# Altium PCB SPARK_Controller.PcbDoc (part 1 of 2)
Units mm, origin at the board's own origin, x right, y up, seen from the top; angles counter-clockwise.
Board outline 173.28 x 117.98 mm, 2 copper layers (Top Layer, Bottom Layer); 146 components, 113 nets, 445 pads, 537 vias.
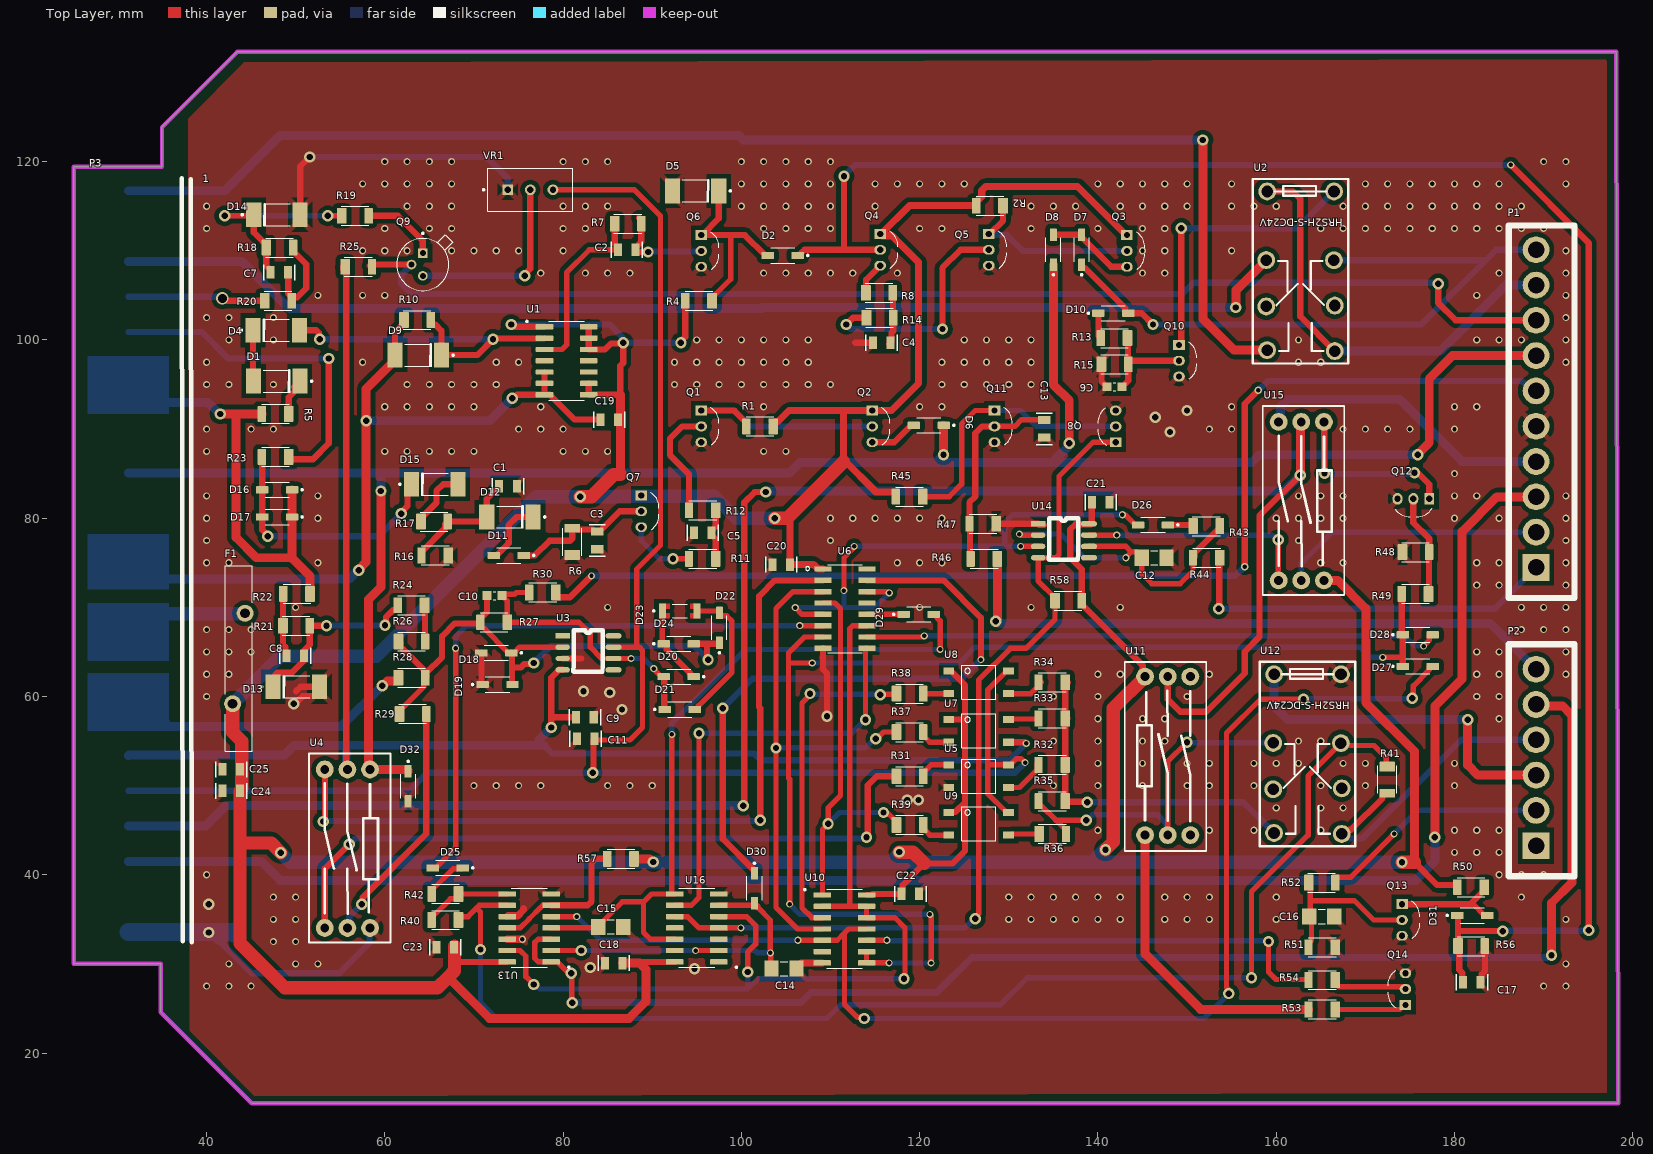
[diagram p0: Top Layer view]
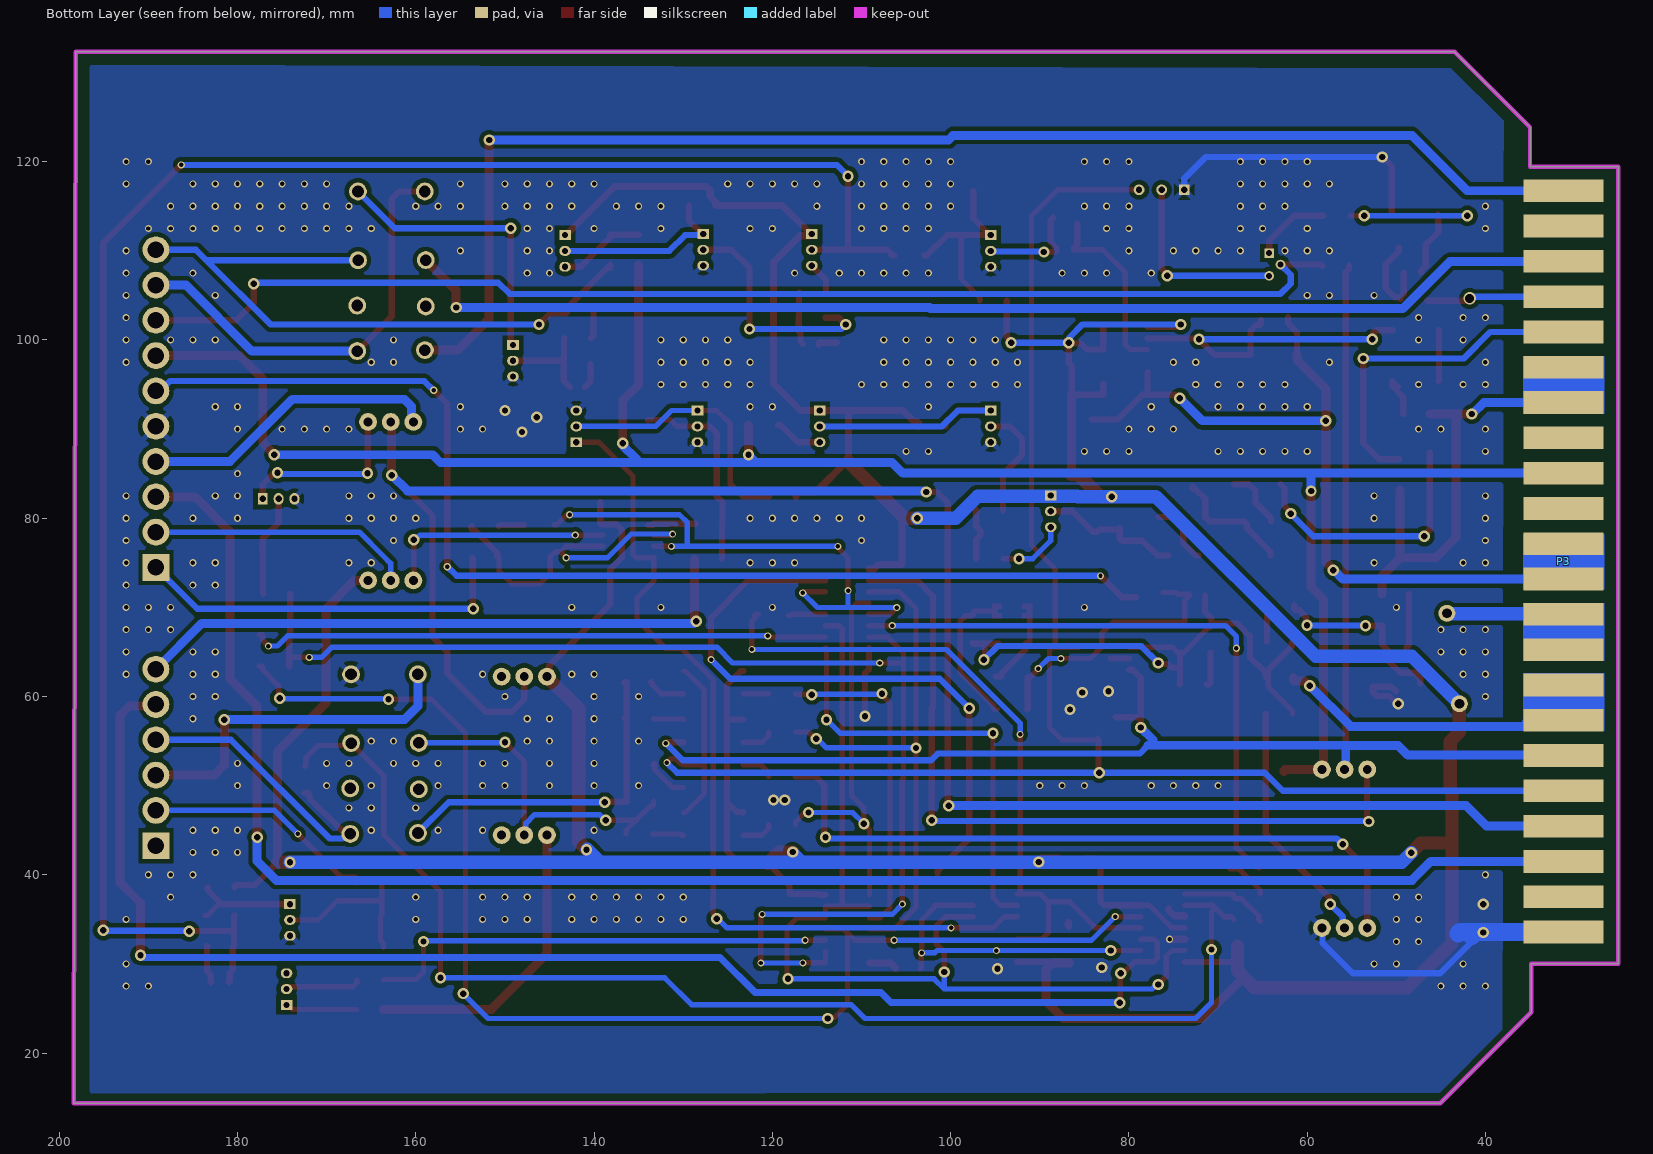
[diagram p1: Bottom Layer view, seen from below]
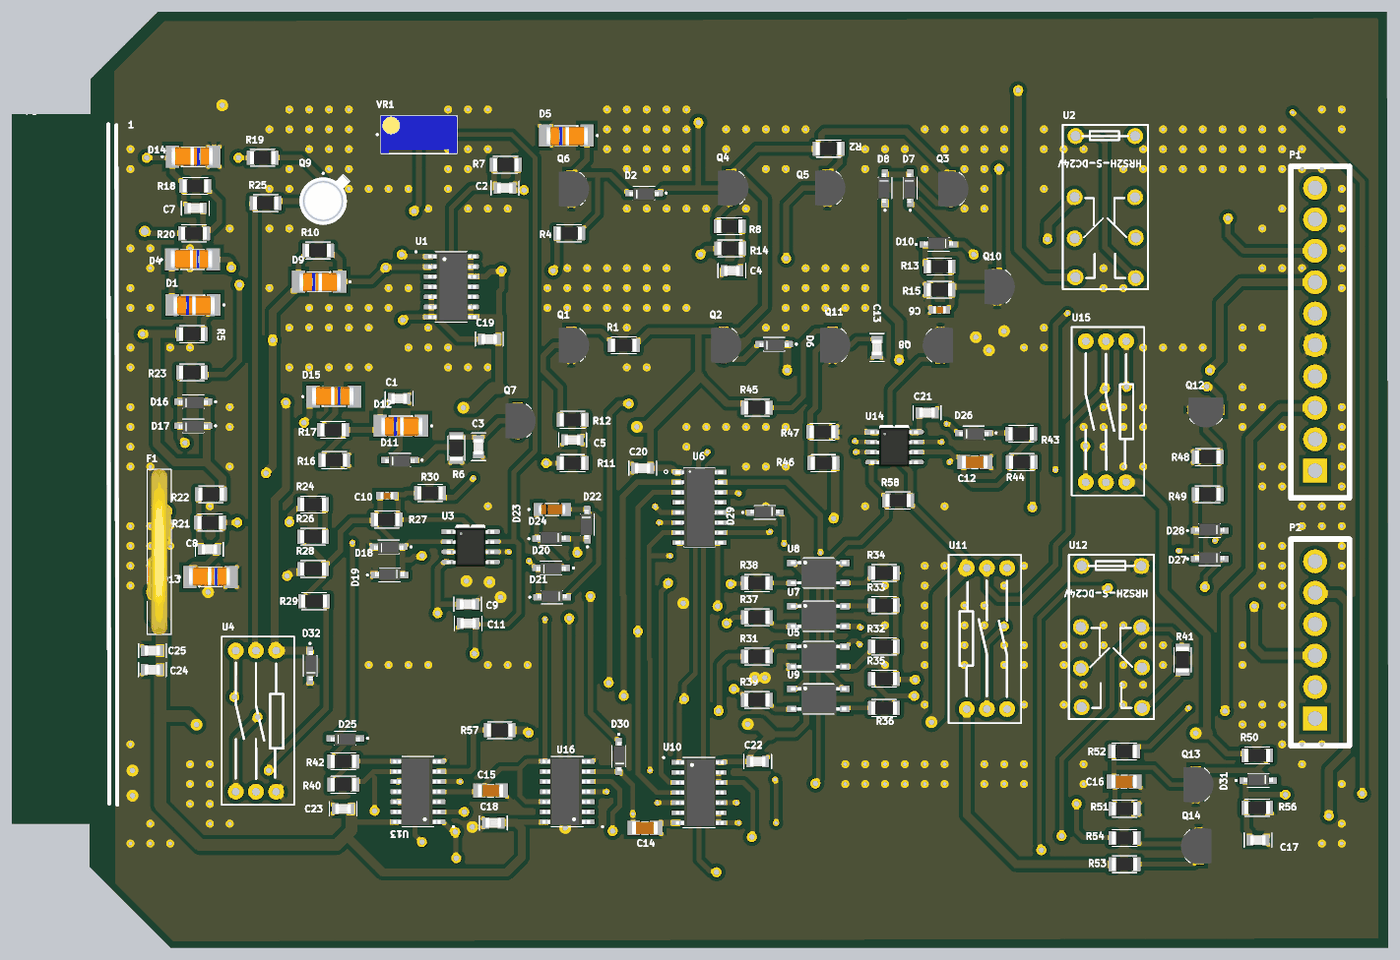
[diagram p3: 3D render of the assembled board from above, using the file's embedded part models]

## Layer stack, top to bottom
Top Solder: solder mask 0.0102, Solder Resist, Dk 3.5
Top Layer: signal copper 0.0356
Dielectric 1: dielectric 0.32, FR-4, Dk 4.8
Bottom Layer: signal copper 0.0356
Bottom Solder: solder mask 0.0102, Solder Resist, Dk 3.5

## Board outline
25.098,30.022 25.098,119.449 35.004,119.449 35.004,123.875 43.463,132.334 198.172,132.334 198.378,14.351 45.087,14.351 34.877,24.561 34.877,30.022

## Design rules (kind name [scope] priority, off if disabled: settings)
Clearance [All] p1: gap=0.5 ignorepadtopadclearanceinfootprint=FALSE except(0.4: Arc-Arc Arc-Track Arc-SMDPad Arc-THPad Arc-Via Arc-Text Arc-Hole Track-Track Track-SMDPad Track-THPad Track-Via Track-Text Track-Hole SMDPad-SMDPad SMDPad-THPad SMDPad-Via SMDPad-Text SMDPad-Hole THPad-THPad THPad-Via THPad-Text THPad-Hole Via-Via Via-Text Via-Hole Text-Text Text-Hole)
PlaneClearance [All] p1: clearance=0.6
PlaneConnect [All] p1: pad.planeconnectstyle=Relief pad.reliefexpansion=0.6 pad.reliefentries=4 pad.reliefconductorwidth=0.5 pad.reliefairgap=0.4 via.planeconnectstyle=Direct via.reliefexpansion=0.508 via.reliefentries=4 via.reliefconductorwidth=0.254 via.reliefairgap=0.254
PolygonConnect [All] p1: thpad.connectstyle=Relief thpad.reliefconductorwidth=0.6 thpad.reliefentries=4 thpad.polygonreliefangle="45 Angle" thpad.airgapwidth=0.5 smdpad.connectstyle=Relief smdpad.reliefconductorwidth=0.6 smdpad.reliefentries=4 smdpad.polygonreliefangle="45 Angle" smdpad.airgapwidth=0.5 via.connectstyle=Direct via.reliefconductorwidth=0.254 via.reliefentries=4 via.polygonreliefangle="90 Angle" via.airgapwidth=0.254
RoutingVias [All] p1: holewidth=0.711 width=1.27 viastyle="Through Hole" minholewidth=0.711 minwidth=1.27 maxholewidth=0.711 maxwidth=1.27
SolderMaskExpansion [All] p1: expansion=0.102 istentingtop=FALSE
UnRoutedNet [All] p1: checkbadconnections=TRUE
Width [All] p1: maxlimit=2 minlimit=0.6 preferedwidth=0.7
27 further rules are at their usual default settings.

## Classes and differential pairs
component class 02-Inputs_Outputs: C24 C25 F1 P1 P2 P3

## Components (designator, comment, footprint, x,y, rotation, side; value= is the part's Value field where it differs from the comment)
C1 "820pF" Cap0805 75.565,84.455 r180 top
C2 "270pF" Cap0805 85.407,109.22 r0 top
C3 "100nF" Cap0805 82.931,79.248 r270 top
C4 "10nF" Cap0805 113.98,98.804 r0 top
C5 "10nF" Cap0805 93.916,77.47 r0 top
C6 "10uF" Cap0603 141.859,94.742 r0 top
C7 "1.5nF" Cap0805 46.43,106.68 r0 top
C8 "270pF" Cap0805 51.689,65.468 r180 top
C9 "10nF" Cap0805 84.201,58.547 r180 top
C10 "560pF" Cap0603 72.302,71.316 r180 top
C11 "10nF" Cap0805 80.772,54.356 r0 top
C12 "10uF" Cap1206 146.304,75.565 r180 top
C13 "10uF" Cap0805 134.874,88.265 r90 top
C14 "10uF" Cap1206 104.775,29.464 r180 top
C15 "10uF" Cap1206 85.344,34.163 r180 top
C16 "10uF" Cap1206 165.1,35.306 r0 top
C17 "10nF" Cap0805 180.213,27.051 r0 top
C18 "100nF" Cap0805 87.439,30.988 r180 top
C19 "100nF" Cap0805 83.439,90.17 r0 top
C20 "100nF" Cap0805 102.743,73.914 r0 top
C21 "100nF" Cap0805 138.557,80.899 r0 top
C22 "100nF" Cap0805 120.713,38.735 r180 top
C23 "100nF" Cap0805 68.516,32.766 r180 top
C24 "100nF" Cap0805 41.021,48.514 r0 top
C25 "1uF" Cap0805 41.021,50.927 r0 top
D1 "24V0" Melf 47.879,95.377 r180 top
D2 "1N4148" SOD-123 104.648,109.474 r180 top
D4 "24V0" Melf 47.812,101.092 r0 top
D5 "8V2" Melf 94.869,116.713 r180 top
D6 "1N4148" SOD-123 121.031,90.424 r180 top
D7 "1N4148" SOD-123 138.176,110.109 r90 top
D8 "1N4148" SOD-123 135.001,110.109 r90 top
D9 "12V0" Melf 63.754,98.298 r180 top
D10 "1N4148" SOD-123 141.732,102.997 r0 top
D11 "1N4148" SOD-123 73.914,75.819 r180 top
D12 "3V3" Melf 74.041,80.137 r180 top
D13 "18V0" Melf 50.071,61.087 r0 top
D14 "12V0" Melf 47.902,114.046 r0 top
D15 "6V2" Melf 65.599,83.82 r0 top
D16 "1N4148" SOD-123 47.917,83.185 r180 top
D17 "1N4148" SOD-123 47.917,80.137 r180 top
D18 "1N4148" SOD-123 72.517,64.897 r180 top
D19 "1N4148" SOD-123 72.644,61.341 r0 top
D20 "1N4148" SOD-123 92.964,62.23 r180 top
D21 "1N4148" SOD-123 93.091,58.547 r0 top
D22 "1N4148" SOD-123 97.536,67.691 r90 top
D23 "3V3" MINIMELF 93.091,69.596 r0 top
D24 "1N4148" SOD-123 92.964,65.913 r0 top
D25 "1N4148" SOD-123 67.056,40.767 r180 top
D26 "1N4148" SOD-123 146.177,79.248 r180 top
D27 "1N4148" SOD-123 175.884,63.373 r0 top
D28 "1N4148" SOD-123 175.884,66.929 r0 top
D29 "1N4148" SOD-123 119.888,69.215 r0 top
D30 "1N4148" SOD-123 101.473,38.481 r270 top
D31 "1N4148" SOD-123 181.991,35.433 r0 top
D32 "1N4148" SOD-123 62.611,49.911 r270 top
F1 "PPTC-FUSE-30V1.1A" RXEF250 43.626,64.257 r270 top
P1 "PWR_HDR_10P" PWR_HDR_10P 189.146,74.48 r90 top
P2 "PWR_HDR_6P" PWR_HDR_6P 189.146,43.261 r90 top
P3 "PCI" PCI 31.242,116.735 r0 top
Q1 "BC337-DIP" SOT54 95.504,90.297 r0 top
Q2 "BC337-DIP" SOT54 114.681,90.297 r0 top
Q3 "BC337-DIP" SOT54 143.256,109.982 r0 top
Q4 "BC337-DIP" SOT54 115.57,110.109 r0 top
Q5 "BC337-DIP" SOT54 127.762,110.109 r0 top
Q6 "BC337-DIP" SOT54 95.504,109.982 r0 top
Q7 "BC337-DIP" SOT54 88.773,80.772 r0 top
Q8 "BC337-DIP" SOT54 141.986,90.297 r180 top
Q9 "BC177" TO-18 64.262,108.458 r270 top
Q10 "BC337-DIP" SOT54 149.098,97.663 r0 top
Q11 "BC337-DIP" SOT54 128.397,90.297 r0 top
Q12 "BC337-DIP" SOT54 175.387,82.169 r270 top
Q13 "BC337-DIP" SOT54 174.117,34.925 r0 top
Q14 "BC337-DIP" SOT54 174.498,27.178 r180 top
R1 "4.7K" Res1206 102.108,90.297 r180 top value=1K
R2 "1.2K" Res1206 127.889,115.062 r180 top value=1K
R4 "4.7K" Res1206 95.25,104.394 r180 top value=1K
R5 "6K8" Res1206 47.752,91.694 r180 top value=1K
R6 "330K" Res1206 81.026,77.343 r90 top value=1K
R7 "100K" Res1206 87.249,113.03 r0 top value=1K
R8 "3.9K" Res1206 115.443,105.283 r0 top value=1K
R10 "10K" Res1206 63.627,102.235 r0 top value=1K
R11 "3.9K" Res1206 95.663,75.438 r180 top value=1K
R12 "10K" Res1206 95.663,80.899 r180 top value=1K
R13 "165k" Res1206 141.859,100.203 r180 top value=1K
R14 "10K" Res1206 115.502,102.489 r0 top value=1K
R15 "8.2k" Res1206 141.859,97.282 r0 top value=1K
R16 "6K8" Res1206 65.659,75.819 r180 top value=1K
R17 "10K" Res1206 65.516,79.629 r0 top value=1K
R18 "1.2K" Res1206 48.177,110.363 r0 top value=1K
R19 "10K" Res1206 56.642,113.919 r0 top value=1K
R20 "1k" Res1206 48.006,104.394 r0 top value=1K
R21 "27K" Res1206 50.038,67.945 r0 top value=1K
R22 "1k" Res1206 50.149,71.501 r180 top value=1K
R23 "10K" Res1206 47.752,86.868 r180 top value=1K
R24 "8.2k" Res1206 62.992,70.231 r180 top value=1K
R25 "1K8" Res1206 57.023,108.204 r0 top value=1K
R26 "1K8" Res1206 62.992,66.167 r0 top value=1K
R27 "33K" Res1206 72.263,68.326 r180 top value=1K
R28 "2K2" Res1206 62.992,62.103 r0 top value=1K
R29 "47k" Res1206 63.119,58.039 r0 top value=1K
R30 "2k7" Res1206 77.724,71.672 r180 top value=1K
R31 "1K5" Res1206 118.872,51.054 r0 top value=1K
R32 "47k" Res1206 134.874,52.324 r180 top value=1K
R33 "56k" Res1206 134.874,57.531 r180 top value=1K
R34 "18k" Res1206 134.874,61.595 r180 top value=1K
R35 "18k" Res1206 134.874,48.26 r180 top value=1K
R36 "100K" Res1206 134.874,44.577 r0 top value=1K
R37 "1K5" Res1206 118.872,56.007 r0 top value=1K
R38 "1K5" Res1206 118.872,60.325 r0 top value=1K
R39 "1K5" Res1206 118.872,45.593 r0 top value=1K
R40 "1K5" Res1206 66.802,34.925 r180 top value=1K
R41 "15k" Res1206 172.466,50.673 r270 top value=1K
R42 "1k" Res1206 66.802,37.846 r180 top value=1K
R43 "10K" Res1206 152.146,79.121 r0 top value=1K
R44 "100K" Res1206 152.205,75.565 r180 top value=1K
R45 "10K" Res1206 118.872,82.423 r180 top value=1K
R46 "22K" Res1206 127.254,75.438 r180 top value=1K
R47 "10K" Res1206 127.127,79.375 r180 top value=1K
R48 "10K" Res1206 175.625,76.2 r0 top value=1K
R49 "10K" Res1206 175.625,71.501 r180 top value=1K
R50 "4.7K" Res1206 181.864,38.608 r180 top value=1K
R51 "10K" Res1206 165.164,31.877 r180 top value=1K
R52 "10K" Res1206 165.1,39.116 r0 top value=1K
R53 "390R" Res1206 165.164,24.892 r180 top value=1K
R54 "10K" Res1206 165.164,28.194 r180 top value=1K
R56 "180K" Res1206 181.865,32.004 r0 top value=1K
R57 "10K" Res1206 86.487,41.783 r180 top value=1K
R58 "1k" Res1206 136.652,70.739 r0 top value=1K
U1 "HEF4093BT" SOIC-14 80.391,97.663 r0 top
U2 "HRS2H-S-DC24V" HRS2H-S-DC24V 162.726,107.702 r270 top
U3 "OP07CD" SOP8 82.804,64.897 r0 top
U4 "OL-C-212H" ol-c-212H 58.343,51.816 r270 top
U5 "TLP127" TLP127 126.619,51.054 r0 top
U6 "CD4049UBM" SOIC-16 111.623,69.85 r0 top
U7 "TLP127" TLP127 126.619,56.134 r0 top
U8 "TLP127" TLP127 126.619,61.595 r0 top
U9 "TLP127" TLP127 126.619,45.72 r0 top
U10 "CD4011BM" SOIC-14 111.568,33.92 r0 top
U11 "OL-C-212H" ol-c-212H 145.288,44.45 r90 top
U12 "HRS2H-S-DC24V" HRS2H-S-DC24V 163.506,53.532 r270 top
U13 "HEF4066BT" SOIC-14 76.2,34.036 r180 top
U14 "NE555D" SOP8 136.144,77.47 r0 top
U15 "OL-C-212H" ol-c-212H 165.354,90.805 r270 top
U16 "NE556D" SOIC-14 94.996,34.036 r180 top
VR1 "10K" Multi_Turn 76.327,116.84 r0 top

## Footprints (in the part's own frame and the unit in brackets; to place one, negate y for a bottom-side part, rotate by r counter-clockwise, add the part's x,y. Pads: shape width x height; smd on the part's side, far side on the other; paste and mask are expansions set on the pad)
Cap0603 [mm]
  rect 1x1 smd: 1(-0.85,0) 2(0.85,0)
  silkscreen extent -0.15,-0.45 0.15,0.45, body extent -0.8,-0.45 0.8,0.45, height 0.8
Cap0805 [mm]
  rect 0.9x1.4 smd: 1(0.762,0.889) 2(2.73,0.889)
  silkscreen extent 0,0 3.49,1.78, body extent 0.74,0.26 2.74,1.51, height 0.81
Cap1206 [mm]
  rect 1.6x1.8 smd: 1(-1.4,0) 2(1.4,0)
  silkscreen extent -0.4,-0.8 0.4,0.8, body extent -1.6,-0.8 1.6,0.8, height 0.94
HRS2H-S-DC24V [mm]
  round 2 hole 1.3 paste+0 mask+0.051: 1(-8.952,-3.74) 2(-1.256,-3.849) 3(3.943,-3.849) 4(8.846,-3.75) 5(8.952,3.847) 6(3.844,3.849) 7(-1.236,3.75) 8(-8.952,3.76)
  silkscreen extent -10.36,-5.35 10.34,5.35
Melf [mm]
  rect 1.7x2.78 smd: A(2.6,0) C(-2.6,0)
  silkscreen extent -4,-1.23 1.5,1.23, body extent -2.7,-1.27 2.45,1.4, height 1.34
MINIMELF [mm]
  rect 0.8x1.65 smd: A(1.95,0) C(-1.95,0)
  Top Layer region: -1.15,0.25 -1.65,0.25 -1.65,-0.25 -1.15,-0.25 -1.15,-0.825 -2.24,-0.825 -2.24,0.825 -1.15,0.825
  Top Layer region: 2.25,-0.825 1.15,-0.825 1.15,-0.25 1.65,-0.25 1.65,0.25 1.15,0.25 1.15,0.825 2.25,0.825
  silkscreen extent -3.02,-0.75 0.83,0.75, body extent -1.72,-0.75 1.72,0.75, height 1.5
Multi_Turn [mm]
  rect 1.218x1.218 / inner round 1.218 / far side rect 1.218x1.218 hole 0.71: 1(-2.54,0)
  round 1.218 hole 0.71: 2(0,0) 3(2.54,0)
  silkscreen extent -5.35,-2.41 4.76,2.42, body extent -4.76,-2.41 4.76,2.42, height 11.55
ol-c-212H [mm]
  round 2 hole 1: 1(0,0) 2(17.78,0) 3(0,-2.54) 4(17.78,-2.54) 5(0,-5.08) 6(17.78,-5.08)
  silkscreen extent -1.78,-6.86 19.43,2.29
PCI [mm]
  rect 9x2.54 smd far side: 1(0,0) 2(0,-3.96) 3(0,-7.92) 4(0,-11.88) 5(0,-15.84) 6(0,-19.8) 7(0,-23.76) 8(0,-27.72) 9(0,-31.68) 10(0,-35.64) 11(0,-39.6) 12(0,-43.56) 13(0,-47.52) 14(0,-51.48) 15(0,-55.44) 16(0,-59.4) 17(0,-63.36) 18(0,-67.32) 19(0,-71.28) 20(0,-75.24) 21(0,-79.2) 22(0,-83.16)
  silkscreen extent 5.97,-84.33 7.11,1.4
PWR_HDR_6P [mm]
  rect 3x3 hole 1.85: 1(0,0)
  round 3 hole 1.85: 2(3.96,0) 3(7.92,0) 4(11.88,0) 5(15.84,0) 6(19.8,0)
  silkscreen extent -3.43,-4.32 22.61,3.05
PWR_HDR_10P [mm]
  rect 3x3 hole 1.85: 1(0,0)
  round 3 hole 1.85: 2(3.96,0) 3(7.92,0) 4(11.88,0) 5(15.84,0) 6(19.8,0) 7(23.76,0) 8(27.72,0) 9(31.68,0) 10(35.64,0)
  silkscreen extent -3.43,-4.32 38.35,3.05
Res1206 [mm]
  rrect14% 1.09x1.77 smd: 1(-1.465,0)
  rrect14% 0.94x1.77 smd: 2(1.54,0)
  silkscreen extent -1.55,-1.06 1.55,1.06, body extent -1.6,-0.8 1.6,0.8, height 0.6
RXEF250 [mm]
  round 1.9 hole 1.1: 1(-5.075,0.7) 2(5.075,-0.7)
  silkscreen extent -10.4,-1.5 10.4,1.5, body extent -10.4,-1.5 10.4,1.5, height 25.4
SOD-123 [mm]
  rrect18% 1.4x0.8 smd: A(1.68,0) C(-1.68,0)
  silkscreen extent -2.9,-0.85 1.35,0.85, body extent -1.82,-0.65 1.83,0.9, height 1.44
SOIC-14 [mm]
  rrect25% 1.97x0.6 smd: 1(-2.475,3.81) 2(-2.475,2.54) 3(-2.475,1.27) 4(-2.475,0) 5(-2.475,-1.27) 6(-2.475,-2.54) 7(-2.475,-3.81) 8(2.475,-3.81) 9(2.475,-2.54) 10(2.475,-1.27) 11(2.475,0) 12(2.475,1.27) 13(2.475,2.54) 14(2.475,3.81)
  silkscreen extent -4.54,-4.43 2,4.51, body extent -2.87,-4.28 3.13,4.28, height 1.8
SOIC-16 [mm]
  rect 1.9x0.6 smd: 1(-2.455,4.445) 2(-2.455,3.175) 3(-2.455,1.905) 4(-2.455,0.635) 5(-2.455,-0.635) 6(-2.455,-1.905) 7(-2.455,-3.175) 8(-2.455,-4.445) 9(2.455,-4.445) 10(2.455,-3.175) 11(2.455,-1.905) 12(2.455,-0.635) 13(2.455,0.635) 14(2.455,1.905) 15(2.455,3.175) 16(2.455,4.445)
  silkscreen extent -4.42,-4.95 1.95,4.95, body extent -3,-4.95 3,4.95, height 1.75
SOP8 [mm]
  rect 1.6x0.6 smd: 1(-2.85,1.905)
  oval 1.6x0.6 smd: 2(-2.85,0.635) 3(-2.85,-0.635) 4(-2.85,-1.905)
  oval 1.8x0.6 smd: 5(2.85,-1.905) 6(2.85,-0.635) 7(2.85,0.635) 8(2.85,1.905)
  silkscreen extent -1.65,-2.13 1.63,2.54, body extent -2.98,-2.5 3.02,2.4, height 1.7
SOT54 [mm]
  oval 1.3x1.1 hole 0.7: 1(0,0) 2(0,-1.778)
  rect 1.3x1.1 hole 0.7: 3(0,1.778)
  silkscreen extent 1.06,-2.04 1.98,2.1, body extent -1.58,-2.28 2.26,2.28, height 10.44
TLP127 [mm]
  rect 1.2x0.8 smd: 1(-3.35,1.27) 2(-3.35,-1.27) 3(3.35,-1.27) 4(3.35,1.27)
  silkscreen extent -1.88,-1.91 1.93,1.91, body extent -3.47,-1.78 3.52,1.82, height 2.8
TO-18 [mm]
  rect 1.08x1.08 hole 0.68: 1(-1.27,0)
  round 1.08 hole 0.68: 2(0,-1.27) 3(1.27,0)
  silkscreen extent -3.6,-2.92 2.92,3.34, body extent -3.27,-2.9 2.9,3.27, height 10.38

## Part data
C1: library part Cap-0805-820pF, "Cap 0805 820pF", Adding Time=1402-10-20, Additionner=A.Abdolahzadeh, Category=Cap, ID=118, Part Number=Cap-0805-820pF, Sub-Category=Cer0805
C2 C8: library part Cap-0805-270pF, "Cap 0805 270pF", Adding Time=1402-10-20, Additionner=A.Abdolahzadeh, Category=Cap, ID=120, Part Number=Cap-0805-270pF, Sub-Category=Cer0805
C3 C18 C19 C20 C21 C22 C23 C24: library part Cap-0805-100nF, "Cap 0805 100nF", Manufacturer=---, Adding Time=1402-05-18, Additionner=S.Pourmohammad, Category=Cap, Datasheet Path=---, ID=51, Part Number=Cap-0805-100nF, Sub-Category=Cer0805, Supplier="Ic Kala"
C4 C5 C9 C11 C17: library part Cap-0805-10nF, "Cap 0805 10nF", Adding Time=1402-10-20, Additionner=A.Abdolahzadeh, Category=Cap, ID=122, Part Number=Cap-0805-10nF, Sub-Category=Cer0805
C6: library part Cap-0603-10uF, "Cap 0603 10uF", Manufacturer=---, Adding Time=1401-05-17, Additionner=A.Abdolahzadeh, Category=Cap, Datasheet Path=---, ID=40, Part Number=Cap-0603-10uF, Sub-Category=Cer0603
C7: library part Cap-0805-1.5nF, "Cap 0805 1.5nF", Adding Time=1402-10-20, Additionner=A.Abdolahzadeh, Category=Cap, ID=121, Part Number=Cap-0805-1.5nF, Sub-Category=Cer0805
C10: library part Cap-0603-560pF, "Cap 0603 560pF", Adding Time=1402-10-20, Additionner=A.Abdolahzadeh, Category=Cap, ID=123, Part Number=Cap-0603-560pF, Sub-Category=Cer0603
C12 C14 C15 C16: library part Cap-1206-10uF, "Cap 1206 10uF 50V", Manufacturer=---, Adding Time=1401-06-09, Additionner=S.Pourmohammad, Category=Cap, Datasheet Path=---, ID=48, Part Number=Cap-1206-10uF, Sub-Category=Cer1206, Supplier="Ic Kala"
C13: library part Cap-0805-10uF, "Cap 0805 10uF", Manufacturer=---, Adding Time=1401-05-17, Additionner=S.Pourmohammad, Category=Cap, Datasheet Path=---, ID=49, Part Number=Cap-0805-10uF, Sub-Category=Cer0805, Supplier="Ic Kala"
C25: library part Cap-0805-1uF, "Cap 0805 1uF", Manufacturer=---, Adding Time=1402-05-18, Additionner=S.Pourmohammad, Category=Cap, Datasheet Path=---, ID=50, Part Number=Cap-0805-1uF, Sub-Category=Cer0805, Supplier="Ic Kala"
D1 D4 D5 D9 D12 D13 D14 D15: library part ZM, "Zener Diode Melf", Package="DO-213 STMicroelectronics", Additionner=S.Pourmohammad, Availability="Not in stock", Category=Diode, Check_prices=https://www.snapeda.com/parts/TMMBAT41/STMicroelectronics/view-part/2894620/?ref=eda, ID=132, MF=STMicroelectronics, MP=TMMBAT41, Part Number=ZM, Price=None, SnapEDA_Link=https://www.snapeda.com/parts/TMMBAT41/STMicroelectronics/view-part/2894620/?ref=snap, Sub-Category=Zener
D2 D6 D7 D8 D10 D11 D16 D17 D18 D19 D20 D21 D22 D24 D25 D26 D27 D28 D29 D30 D31 D32: "Diode Standard 75 V 300mA (DC) Through Hole DO-35 Mimi Melf", Package="AXIAL LEAD-2 ON Semiconductor", Adding Time=1402-10-1, Additionner=S.Pourmohammad, Availability="In Stock", Category=Diode, Check_prices=https://www.snapeda.com/parts/1N4148/Onsemi/view-part/?ref=eda, ID=113, MF="ON Semiconductor", MP=1N4148, Part Number=1N4148, Price=None, Purchase-URL=https://pricing.snapeda.com/search/part/1N4148/?ref=eda, SnapEDA_Link=https://www.snapeda.com/parts/1N4148/Onsemi/view-part/?ref=snap, Sub-Category=standard
D23: library part ZMM, "Zener Diode MiniMelf", Package="DO-213 STMicroelectronics", Additionner=S.Pourmohammad, Availability="Not in stock", Category=Diode, Check_prices=https://www.snapeda.com/parts/TMMBAT41/STMicroelectronics/view-part/2894620/?ref=eda, ID=131, MF=STMicroelectronics, MP=TMMBAT41, Part Number=ZMM, Price=None, SnapEDA_Link=https://www.snapeda.com/parts/TMMBAT41/STMicroelectronics/view-part/2894620/?ref=snap, Sub-Category=Zener
F1: "Polymeric PTC Resettable Fuse 30V 1.1A Through Hole Radial, Disc", Adding Time=1402-10-13, Additionner=A.Abdolahzadeh, Category=Fuse, ID=117, MANF=Reomax, MANF_P#=SFE1100, PARAM="1A; 125VDC; fast acting", PARAM2="0.25 Ohm DC Cold Resistance", Part Number=PPTC-FUSE-30V1.1A, Price=260toman@Javan, Sub-Category=PPTC
P1: library part "Power Connector 10 Pin", "P-P= 3.96mm", Adding Time=1402-10-1, Additionner=S.Pourmohammad, Category=Connector, ID=101, Part Number="Power Connector 10 Pin", Sub-Category="Power Connector"
P2: library part "Power Connector 6 Pin", "P-P= 3.96mm", Adding Time=1402-10-1, Additionner=S.Pourmohammad, Category=Connector, ID=100, Part Number="Power Connector 6 Pin", Sub-Category="Power Connector"
P3: "normal PAD for SPARK project", Adding Time=1402-10-1, Additionner=S.Pourmohammad, Category=Connector, ID=81, Part Number=PCI, Sub-Category=PCI
Q1 Q2 Q3 Q4 Q5 Q6 Q7 Q8 Q10 Q11 Q12 Q13 Q14: "General Purpose Transistor 45V - 500 mA NPN", Manufacturer=NXP, Adding Time=1402-9-24, Additionner=A.Abdolahzadeh, Category=Transistor, Datasheet Path=Datasheets\BC337_PhilipsSemiconductors.pdf, ID=119, Part Number=BC337-DIP, Sub-Category=BJT-NPN
Q9: Manufacturer=---, Package="SOT-89-3 Nexperia", Adding Time=1402-09-26, Additionner=A.Abdolahzadeh, Availability=Unavailable, Category=Transistor, Datasheet Path=---, ID=133, MF="Nexperia USA", MP=BCX53-16,115, Part Number=BC177, Price=None, SnapEDA_Link=https://www.snapeda.com/parts/BCX53-16,115/Nexperia%20USA%20Inc./view-part/1098173/?ref=snap, Sub-Category=BJT-PNP
R1 R4 R50: library part Res-1206-4.7k, Manufacturer=---, Adding Time=1402-09-24, Additionner=A.Abdolahzadeh, Category=Res, Datasheet Path=---, ID=95, Part Number=Res-1206-4.7k, Sub-Category=SMD-1206
R2 R18: library part Res-1206-1.2k, Manufacturer=---, Adding Time=1402-09-24, Additionner=A.Abdolahzadeh, Category=Res, Datasheet Path=---, ID=92, Part Number=Res-1206-1.2k, Sub-Category=SMD-1206
R5 R16: library part Res-1206-6K8, "Resistor 1206 6.8 Kohm", Adding Time=1402-10-1, Additionner=S.Pourmohammad, Category=Res, ID=67, Part Number=Res-1206-6K8, Sub-Category=SMD-1206, Supplier="Ic Kala"
R6: library part Res-1206-330K, Manufacturer=---, Adding Time=1402-09-24, Additionner=A.Abdolahzadeh, Category=Res, Datasheet Path=---, ID=91, Part Number=Res-1206-330K, Sub-Category=SMD-1206
R7 R44: library part Res-1206-100k, Manufacturer=---, Part Number=Res-1206-100K, Adding Time=1402-09-24, Additionner=A.Abdolahzadeh, Category=Res, Datasheet Path=---, ID=96, Sub-Category=SMD-1206
R8 R11: library part Res-1206-3.9k, Manufacturer=---, Adding Time=1402-09-24, Additionner=A.Abdolahzadeh, Category=Res, Datasheet Path=---, ID=94, Part Number=Res-1206-3.9k, Sub-Category=SMD-1206
R10 R12 R14 R17 R19 R23 R43 R45 R47 R48 R49 R51 R52 R54 R57: library part Res-1206-10K, "Resistor 1206 10 Kohm", Manufacturer=---, Adding Time=1402-10-1, Additionner=S.Pourmohammad, Category=Res, Datasheet Path=---, ID=66, Part Number=Res-1206-10K, Sub-Category=SMD-1206, Supplier="Ic Kala"
R13: library part Res-1206-165K, Manufacturer=---, Adding Time=1402-09-26, Additionner=A.Abdolahzadeh, Category=Res, Datasheet Path=---, ID=111, Part Number=Res-1206-165K
R15 R24: library part Res-1206-8.2K, Manufacturer=---, Adding Time=1402-09-26, Additionner=A.Abdolahzadeh, Category=Res, Datasheet Path=---, ID=112, Part Number=Res-1206-8.2K
R20 R22 R42 R58: library part Res-1206-1K, Manufacturer=---, Adding Time=1402-09-26, Additionner=A.Abdolahzadeh, Category=Res, Datasheet Path=---, ID=88, Part Number=Res-1206-1K
R21: library part Res-1206-27K, "Resistor 1206 27 Kohm", Adding Time=1402-10-1, Additionner=S.Pourmohammad, Category=Res, ID=70, Part Number=Res-1206-27K, Sub-Category=SMD-1206, Supplier="Ic Kala"
R25 R26: library part Res-1206-1K8, "Resistor 1206 1.8 Kohm", Adding Time=1402-10-1, Additionner=S.Pourmohammad, Category=Res, ID=102, Part Number=Res-1206-1K8, Sub-Category=SMD-1206, Supplier="Ic Kala"
R27: library part Res-1206-33K, "Resistor 1206 33 Kohm", Adding Time=1402-10-1, Additionner=S.Pourmohammad, Category=Res, ID=71, Part Number=Res-1206-33K, Sub-Category=SMD-1206, Supplier="Ic Kala"
R28: library part Res-1206-2K2, "Resistor 1206 2.2 Kohm", Adding Time=1402-10-1, Additionner=S.Pourmohammad, Category=Res, ID=82, Part Number=Res-1206-2K2, Sub-Category=SMD-1206, Supplier="Ic Kala"
R29 R32: library part Res-1206-47K, Manufacturer=---, Adding Time=1402-09-26, Additionner=A.Abdolahzadeh, Category=Res, Datasheet Path=---, ID=109, Part Number=Res-1206-47K
R30: library part Res-1206-2K7, Manufacturer=---, Adding Time=1402-09-26, Additionner=A.Abdolahzadeh, Category=Res, Datasheet Path=---, ID=110, Part Number=Res-1206-2K7
R31 R37 R38 R39 R40: library part Res-1206-1K5, "Resistor 1206 1.5 Kohm", Adding Time=1402-10-1, Additionner=S.Pourmohammad, Category=Res, ID=99, Part Number=Res-1206-1K5, Sub-Category=SMD-1206, Supplier="Ic Kala"
R33: library part Res-1206-56K, Manufacturer=---, Adding Time=1402-09-26, Additionner=A.Abdolahzadeh, Category=Res, Datasheet Path=---, ID=107, Part Number=Res-1206-56K
R34 R35: library part Res-1206-18K, Manufacturer=---, Adding Time=1402-09-26, Additionner=A.Abdolahzadeh, Category=Res, Datasheet Path=---, ID=108, Part Number=Res-1206-18K
R36: library part Res-1206-100K, Manufacturer=---, Adding Time=1402-09-24, Additionner=A.Abdolahzadeh, Category=Res, Datasheet Path=---, ID=96, Part Number=Res-1206-100K, Sub-Category=SMD-1206
R41: library part Res-1206-15k, Manufacturer=---, Adding Time=1402-09-24, Additionner=A.Abdolahzadeh, Category=Res, Datasheet Path=---, ID=98, Part Number=Res-1206-15k, Sub-Category=SMD-1206
R46: library part Res-1206-22K, "Resistor 1206 22 Kohm", Adding Time=1402-10-1, Additionner=S.Pourmohammad, Category=Res, ID=69, Part Number=Res-1206-22K, Sub-Category=SMD-1206, Supplier="Ic Kala"
R53: library part Res-1206-390R, Manufacturer=---, Adding Time=1402-09-26, Additionner=A.Abdolahzadeh, Category=Res, Datasheet Path=---, ID=106, Part Number=Res-1206-390R
R56: library part Res-1206-180K, "Resistor 1206 180K", Adding Time=1402-10-13, Additionner=A.Abdolahzadeh, Category=Res, ID=116, Part Number=Res-1206-180K
U1: "2 input NAND schmitt trigger with 4 channel", Adding Time=1402-10-12, Additionner=A.Abdolahzadeh, Category=Logic-IC, ID=136, Part Number=HEF4093BT, Sub-Category=NAND
U2 U12: "Relay with 2 contact and 24VDC with 1A current", JLCPCB Part Class="Extended Part", Manufacturer=HUIGANG, Adding Time=1402-9-24, Additionner=S.Pourmohammad, Category=Relay, Datasheet Path=Datasheets\HRS2H-S-DC24v-h.pdf, ID=121, Manufacturer Part=HRS2H-S-DC24V, Part Number=HRS2H-S-DC24V, spicePre=K, spiceSymbolName=HRS2H-S-DC24V, Sub-Category=2Contact, Supplier=LCSC, Supplier Part=C12249
U3: "Low-Offset voltage (0.25mV) single operational amplifier 8-SOIC 0 to 70", Manufacturer="Analog Device", Package="SOIC-8 Texas Instruments", Adding Time=1402-09-26, Additionner=A.Abdolahzadeh, Availability=Unavailable, Category=OpAmp, Datasheet Path=Datasheets\OP07.pdf, ID=105, MF="Texas Instruments", MP=OP07CD, Part Number=OP07CD, Price=None, Purchase-URL=https://pricing.snapeda.com/search/part/OP07CD/?ref=eda, SnapEDA_Link=https://www.snapeda.com/parts/OP07CD/Texas%20Instruments/view-part/516771/?ref=snap, Sub-Category="1 channel"
U4 U11 U15: "REED RELAY  2 Contact", Adding Time=1402-10-1, Additionner=S.Pourmohammad, Category=Relay, ID=130, Part Number=OL-C-212H, Sub-Category="RELAY REED SPDT", Supplier=……..
U5 U7 U8 U9: library part TLP127smd, "typical Optocoupler with 1 channel and DIP", Adding Time=1402-10-12, Additionner=A.Abdolahzadeh, Category=Optocoupler, ID=137, Part Number=TLP127smd, Sub-Category=SMD
U6: "6-ch, 3-V to 18-V inverters", Manufacturer="Texas Instrument", Adding Time=1402-10-12, Additionner=A.Abdolahzadeh, Category=Logic-IC, ID=135, Part Number=CD4049UBM, Sub-Category=NOT
U10: Manufacturer="Texas Instrument", Package=None, Adding Time=1402-10-12, Additionner=A.Abdolahzadeh, Availability=Unavailable, Category=Logic-IC, ID=134, MP=CD4011BE, Part Number=CD4011BM, Price=None, Sub-Category=NAND
U13: "4 Channel Circuit Analog IC Switch 1:1 with Enable", Manufacturer=Nexperia, Package="SO-14 NXP Semiconductors", Adding Time=1402-09-27, Additionner=A.Abdolahzadeh, Availability=Unavailable, Category=Switch, Datasheet Path=Datasheets\HEF4066B-2938016.pdf, ID=129, MF="NXP Semiconductors", MP=HEF4066BT, Part Number=HEF4066BT, Price=None, SnapEDA_Link=https://www.snapeda.com/parts/HEF4066BT/NXP%20Semiconductors/view-part/4303716/?ref=snap, Sub-Category=IC
U14: "555 Type, Timer/Oscillator (Single) IC 500kHz 8-SOIC", Manufacturer=ST, Package="SOIC-8 Texas Instruments", Adding Time=1402-09-26, Additionner=A.Abdolahzadeh, Availability="In Stock", Category=Logic-IC, Check_prices=https://www.snapeda.com/parts/NE555D/STMicroelectronics/view-part/?ref=eda, Datasheet Path=Datasheets\NE555.pdf, ID=104, MF=STMicroelectronics, MP=NE555D, Part Number=NE555D, Price=None, Purchase-URL=https://pricing.snapeda.com/search/part/NE555D/?ref=eda, SnapEDA_Link=https://www.snapeda.com/parts/NE555D/STMicroelectronics/view-part/?ref=snap, Sub-Category=Timer
U16: "Dual 555 Timer 500kHz", Manufacturer=ST, Package="SOIC-14 Texas Instruments", Adding Time=1402-09-27, Additionner=A.Abdolahzadeh, Availability=Unavailable, Category=Logic-IC, Datasheet Path=Datasheets\NE556D.pdf, ID=128, MF=STMicroelectronics, MP=NE556D, Part Number=NE556D, Price=None, SnapEDA_Link=https://www.snapeda.com/parts/NE556D/STMicroelectronics/view-part/12906/?ref=snap, Sub-Category=Timer
VR1: library part "Res Variable", "Resistor Variable Multi turn", Package="SOT-23-5 Bourns", Adding Time=1402-09-26, Additionner=S.Pourmohammad, Availability="Not in stock", Category=Res, Check_prices=https://www.snapeda.com/parts/3296W-OT1-204/Bourns/view-part/?ref=eda, ID=113, MF=Bourns, MP=3296W-OT1-204, Part Number="Res Variable", Price=None, SnapEDA_Link=https://www.snapeda.com/parts/3296W-OT1-204/Bourns/view-part/?ref=snap

## Via types
v1: diameter 0.8, hole 0.5, Top Layer to Bottom Layer, 434 vias
v2: diameter 1.27, hole 0.711, Top Layer to Bottom Layer, 102 vias
v3: diameter 1.4, hole 1, Top Layer to Bottom Layer, 1 vias

## Nets (pads, with @x,y where several pads share a name; then routed paths per layer and width w, separated by ;. In a path a pad name is that pad's centre, name@x,y a point inside that pad or via, vN(x,y) a via of type N, cw(c..) or ccw(c..) an arc to the next point about the centre after c; other vN are vias at no path point)
555Out: D26.A U6.5 U6.14 U14.3 | length 63.7
  Top Layer w0.6: v1(106.045,69.977) 106.807,69.215 U6.5@109.168,69.215 ; v1(111.506,71.882) 111.506,75.565 v1@112.776,76.835 ; U6.14@114.078,71.755 116.405,71.755 116.532,71.628 v1(116.586,71.628) ; v1(131.318,76.835) U14.3@133.294,76.835 ; v1(142.748,80.391) 142.786,80.353 143.092,80.353 144.197,79.248 D26.A@144.497,79.248
  Bottom Layer w0.6: v1(106.045,69.977) 111.506,69.977 ; v1(111.506,71.882) 111.506,69.977 ; v1(112.649,76.835) 129.54,76.835 ; v1(116.586,71.628) 114.935,69.977 111.506,69.977 ; v1(131.318,76.835) 129.54,76.835 ; v1(142.748,80.391) 130.429,80.391 129.54,79.502 129.54,76.835
556AOut: U6.11 U10.2 U10.12 U10.13 U13.13 U16.5 | length 110.2
  Top Layer w0.6: U13.13@73.725,31.496 75.184,31.496 75.819,30.861 75.819,28.575 v2(76.708,27.686) ; U16.5@97.471,35.306 100.584,35.306 101.6,34.29 101.6,32.222 100.711,31.333 v2(100.711,29.083) ; U10.2@109.093,36.46 112.141,36.46 ; U6.11@114.078,67.945 112.492,67.945 112.141,67.594 112.141,36.46 ; v2(118.237,28.321) 118.364,28.448 118.364,34.036 117.21,35.19 U10.12@114.043,35.19 U10.13@114.043,36.46 112.141,36.46
  Bottom Layer w0.6: v2(76.708,27.686) 76.886,27.686 77.394,27.178 99.822,27.178 100.276,27.178 100.657,27.178 ; v2(100.711,29.083) 100.711,27.232 100.657,27.178 ; v2(118.237,28.321) 101.854,28.321 100.711,27.178 100.657,27.178
556BOut: U6.9 U16.9 | length 49
  Top Layer w0.6: U16.9@92.521,36.576 94.391,36.576 95.25,37.435 v2(95.25,55.88) ; v2(113.919,57.404) 113.919,65.405 U6.9@114.078,65.405
  Bottom Layer w0.6: v2(95.25,55.88) 112.395,55.88 v2(113.919,57.404)
GND: C1.1 C3.2 C4.1 C5.1 C6.1 C9.1 C11.1 C12.1 C13.1 C14.1 C15.1 C16.2 C17.2 C18.2 C20.1 C21.2 C22.1 C23.2 C24.1 C25.1 D5.A D13.A D14.A D18.A D19.C D32.A P1.5 P3.22 Q1.2 Q5.2 Q6.2 Q8.2 Q10.2 Q11.2 Q12.2 Q13.2 Q14.2 R6.1 R15.1 R16.1 R47.1 R48.1 R51.1 R56.2 U3.3 U4.2 U5.2 U6.8 U10.7 U12.8 U13.7 U13.10 U13.12 U14.1 U16.7 VR1.1 | length 109.2
  Top Layer w0.6: C15.1@86.744,34.163 C15.1@86.995,34.414
  Top Layer w0.7: v2(49.784,59.182) 49.938,59.182 50.803,60.047 52.171,60.047 52.671,60.547 D13.A@52.671,61.087 50.546,61.087 50.038,60.579 ; D14.A@50.502,114.046 50.502,119.463 v2(51.562,120.523) ; D18.A@70.837,64.897 70.837,61.541 71.037,61.341 D19.C@71.301,61.341 ; U3.3@79.954,64.262 82.042,64.262 ; C15.1@86.744,34.163 C15.1@86.744,34.713 ; U6.8@109.168,65.405 109.168,63.044 109.601,62.611 v2(109.601,57.785) ; 112.776,99.695 114.74,99.695 C4.1@114.742,99.693 ; C4.1@114.808,99.445 C4.1@114.808,99.695 ; R47.1@128.592,79.375 133.302,79.375 133.429,79.248 U14.1@133.929,79.248 ; R15.1@140.394,97.282 140.394,95.357 C6.1@141.009,94.742 ; C17.2@182.944,27.94 183.043,28.04 183.043,28.849 183.43,29.235 183.43,31.979 R56.2@183.405,32.004
  Top Layer w0.8: U13.12@73.725,32.766 v1(75.438,32.766) ; U13.10@73.725,35.306 73.825,35.406 74.927,35.406 75.565,36.044 75.565,36.195 ; C14.1@106.175,29.464 106.175,29.564 106.721,30.11 U10.7@109.093,30.11
  Bottom Layer w0.7: 41.212,32.829 45.085,28.956 54.864,28.956 58.293,32.385 U4.2@58.293,34.164 ; v2(51.562,120.523) 71.374,120.523 73.787,118.11 VR1.1@73.787,116.84
  Bottom Layer w2: P3.22@31.242,33.575 41.101,33.575 ; 41.529,33.147 41.101,33.575 ; 43.053,33.401 42.879,33.575 41.101,33.575
  other v1: 40,27.5 42.5,27.5 45,27.5 190,27.5 192.5,27.5 42.5,30 50,30 52.5,30 192.5,30 47.5,32.5 50,32.5 47.5,35 50,35 130,35 132.5,35 135,35 137.5,35 140,35 142.5,35 147.5,35 150,35 152.5,35 160,35 192.5,35 47.5,37.5 50,37.5 130,37.5 132.5,37.5 135,37.5 137.5,37.5 140,37.5 142.5,37.5 147.5,37.5 150,37.5 152.5,37.5 160,37.5 187.5,37.5 40,40 185,40 187.5,40 190,40 180,42.5 182.5,42.5 185,42.5 140,45 152.5,45 157.5,45 165,45 180,45 182.5,45 185,45 160,47.5 165,47.5 167.5,47.5 70,50 72.5,50 75,50 77.5,50 85,50 87.5,50 90,50 135,50 140,50 145,50 150,50 152.5,50 157.5,50 165,50 170,50 180,50 140,52.5 145,52.5 150,52.5 152.5,52.5 157.5,52.5 160,52.5 162.5,52.5 167.5,52.5 170,52.5 180,52.5 135,55 140,55 145,55 147.5,55 162.5,55 165,55 140,57.5 145,57.5 147.5,57.5 185,57.5 40,60 135,60 140,60 150,60 182.5,60 185,60 40,62.5 42.5,62.5 140,62.5 142.5,62.5 152.5,62.5 182.5,62.5 185,62.5 192.5,62.5 40,65 42.5,65 45,65 182.5,65 185,65 192.5,65 40,67.5 42.5,67.5 45,67.5 187.5,67.5 190,67.5 192.5,67.5 50,70 85,70 120,70 132.5,70 142.5,70 187.5,70 190,70 192.5,70 182.5,72.5 185,72.5 192.5,72.5 40,75 42.5,75 52.5,75 117.5,75 120,75 122.5,75 165,75 167.5,75 182.5,75 185,75 192.5,75 40,77.5 110,77.5 162.5,77.5 192.5,77.5 40,80 52.5,80 110,80 112.5,80 115,80 117.5,80 120,80 122.5,80 160,80 162.5,80 165,80 167.5,80 180,80 185,80 192.5,80 40,82.5 52.5,82.5 162.5,82.5 165,82.5 167.5,82.5 180,82.5 182.5,82.5 192.5,82.5 180,85 40,87.5 60,87.5 62.5,87.5 65,87.5 67.5,87.5 70,87.5 80,87.5 82.5,87.5 85,87.5 102.5,87.5 105,87.5 40,90 45,90 47.5,90 75,90 77.5,90 80,90 152.5,90 155,90 167.5,90 170,90 172.5,90 175,90 180,90 60,92.5 62.5,92.5 65,92.5 67.5,92.5 70,92.5 77.5,92.5 102.5,92.5 120,92.5 122.5,92.5 155,92.5 180,92.5 182.5,92.5 40,95 42.5,95 47.5,95 62.5,95 65,95 67.5,95 70,95 72.5,95 92.5,95 95,95 97.5,95 100,95 102.5,95 105,95 107.5,95 110,95 122.5,95 125,95 127.5,95 130,95 132.5,95 40,97.5 57.5,97.5 72.5,97.5 75,97.5 92.5,97.5 95,97.5 97.5,97.5 100,97.5 102.5,97.5 105,97.5 107.5,97.5 122.5,97.5 125,97.5 127.5,97.5 130,97.5 132.5,97.5 162.5,97.5 165,97.5 192.5,97.5 42.5,100 47.5,100 95,100 97.5,100 100,100 102.5,100 105,100 107.5,100 125,100 127.5,100 130,100 132.5,100 162.5,100 182.5,100 185,100 187.5,100 192.5,100 40,102.5 42.5,102.5 47.5,102.5 192.5,102.5 52.5,105 57.5,105 60,105 182.5,105 192.5,105 77.5,107.5 82.5,107.5 85,107.5 87.5,107.5 102.5,107.5 105,107.5 107.5,107.5 110,107.5 112.5,107.5 117.5,107.5 145,107.5 147.5,107.5 185,107.5 192.5,107.5 57.5,110 60,110 62.5,110 67.5,110 70,110 72.5,110 75,110 80,110 145,110 147.5,110 155,110 192.5,110 40,112.5 60,112.5 65,112.5 67.5,112.5 80,112.5 82.5,112.5 102.5,112.5 105,112.5 107.5,112.5 110,112.5 120,112.5 122.5,112.5 132.5,112.5 140,112.5 145,112.5 147.5,112.5 165,112.5 167.5,112.5 170,112.5 172.5,112.5 175,112.5 177.5,112.5 180,112.5 182.5,112.5 185,112.5 187.5,112.5 190,112.5 40,115 62.5,115 65,115 67.5,115 80,115 82.5,115 85,115 100,115 102.5,115 105,115 107.5,115 110,115 115,115 132.5,115 135,115 137.5,115 142.5,115 145,115 147.5,115 150,115 155,115 157.5,115 160,115 167.5,115 170,115 172.5,115 175,115 177.5,115 180,115 182.5,115 185,115 187.5,115 57.5,117.5 60,117.5 62.5,117.5 65,117.5 67.5,117.5 100,117.5 102.5,117.5 105,117.5 107.5,117.5 110,117.5 115,117.5 117.5,117.5 120,117.5 122.5,117.5 125,117.5 140,117.5 142.5,117.5 145,117.5 147.5,117.5 150,117.5 155,117.5 170,117.5 172.5,117.5 175,117.5 177.5,117.5 180,117.5 182.5,117.5 185,117.5 192.5,117.5 60,120 62.5,120 65,120 67.5,120 80,120 82.5,120 85,120 100,120 102.5,120 105,120 107.5,120 110,120 190,120 192.5,120
  other v2: 94.742,29.464 83.058,29.591 40.259,33.528 40.259,36.703 118.618,48.387 119.876,48.387 86.614,58.547 85.217,60.452 82.296,60.579 148.082,89.662 146.431,91.313 149.987,92.075
IO_01: P2.1
IO_02: P2.2 R52.2 | length 26.1
  Top Layer w0.6: R52.2@166.64,39.116 166.64,39.531 166.81,39.701 168.352,39.701 v1(173.228,44.577)
  Bottom Layer w0.6: v1(173.228,44.577) 175.872,47.221 P2.2@189.146,47.221
IO_03: P2.3 U12.1 | length 39.1
  Top Layer w1: v2(181.483,57.404) 181.483,52.324 182.626,51.181 P2.3@189.146,51.181
  Bottom Layer w1: U12.1@159.766,62.484 159.766,58.928 161.29,57.404 v2(181.483,57.404)
IO_04: P2.4 R41.2 U12.5 | length 34.1
  Top Layer w0.7: U12.5@167.405,44.072 167.405,44.279 168.175,45.049 168.382,45.049 171.931,48.598 171.931,49.013 172.051,49.133 R41.2@172.466,49.133
  Bottom Layer w0.7: U12.5@167.356,44.069 167.617,44.331 167.953,44.331 168.215,44.069 169.672,44.069 180.744,55.141 P2.4@189.146,55.141
IO_05: P2.5 U13.1 U13.3 | length 156.3
  Top Layer w0.6: U13.3@78.675,32.766 77.186,32.766 76.835,32.415 76.835,30.607 77.216,30.226 U13.1@78.675,30.226 79.36,30.226 80.502,29.084 80.771,29.084 v2(80.899,28.956) 80.962,28.892 80.962,25.717 v2(81.026,25.654)
  Top Layer w1: P2.5@189.146,59.101 189.314,58.933 192.146,58.933 193.167,57.912 193.167,39.116 190.881,36.83 v2(190.881,30.988)
  Bottom Layer w0.8: v2(81.026,25.654) 106.68,25.654 107.823,26.797 121.92,26.797 125.857,30.734 127.254,30.734 190.554,30.734 190.808,30.988 v2(190.881,30.988)
IO_06: P2.6 R46.1 | length 69.9
  Top Layer w1: v2(128.524,68.453) 128.524,68.526 128.719,68.721 R46.1@128.719,75.438
  Bottom Layer w1: v2(128.524,68.453) 128.597,68.453 128.851,68.199 184.008,68.199 P2.6@189.146,63.061
IO_07: P1.1 R44.1 | length 43.3
  Top Layer w0.7: v2(153.543,69.85) 153.606,69.913 153.606,75.501 R44.1@153.67,75.565
  Bottom Layer w0.7: v2(153.543,69.85) 184.516,69.85 187.996,73.33 P1.1@189.146,74.48
IO_08: P1.2 U15.4 | length 29.7
  Bottom Layer w0.6: U15.4@162.814,73.025 162.814,74.93 163.703,75.819 166.324,78.44 P1.2@189.146,78.44
IO_09: P1.3 P3.20 | length 196.5
  Top Layer w1: v2(177.8,44.196) 177.8,58.928 180.848,61.976 180.848,78.486 184.762,82.4 P1.3@189.146,82.4
  Bottom Layer w1: P3.20@31.242,41.495 46.135,41.495 48.26,39.37 175.641,39.37 176.72,40.45 177.8,41.529 v2(177.8,44.196)
IO_10: P1.4 U15.5 | length 33.7
  Bottom Layer w1: U15.5@160.274,90.805 160.465,90.996 160.465,92.52 161.29,93.345 173.863,93.345 180.848,86.36 P1.4@189.146,86.36
IO_12: P1.6 R30.1 | length 131.2
  Top Layer w0.7: R30.1@79.189,71.12 80.772,71.12 v1(83.185,73.533) ; v1(156.464,74.549) 156.464,92.837 v1(157.988,94.361)
  Bottom Layer w0.7: v1(83.185,73.533) 155.429,73.533 156.445,74.549 v1(156.464,74.549) ; v1(157.988,94.361) 158.015,94.361 159.031,95.377 187.586,95.377 188.683,94.28 P1.6@189.146,94.28
IO_13: D6.C D8.C D32.C P1.7 P3.9 U4.1 | length 234.2
  Top Layer w1: U4.1@58.216,51.816 58.166,51.866 58.166,70.866 59.563,72.263 v2(59.563,83.058) ; U4.1@58.343,51.816 62.386,51.816 62.411,51.791 62.511,51.791 62.611,51.691 D32.C@62.611,51.591 ; v2(122.682,87.122) 122.696,87.136 122.696,90.409 D6.C@122.711,90.424 ; D8.C@135.001,108.429 135.001,94.996 136.779,93.218 v2(136.779,88.392) ; v2(175.895,87.122) 175.895,87.195 177.165,88.465 177.165,95.631 179.774,98.24 P1.7@189.146,98.24
  Bottom Layer w1: P3.9@31.242,85.055 59.563,85.055 ; v2(59.563,83.058) 59.563,85.055 ; v2(122.682,87.122) 121.793,86.233 ; v2(136.779,88.392) 136.727,88.34 136.727,88.086 135.46,86.819 134.874,86.233 ; v2(175.895,87.122) 158.115,87.122 157.226,86.233 134.874,86.233 ; 59.563,85.055 105.375,85.055 106.553,86.233 121.793,86.233 ; 121.793,86.233 134.874,86.233
IO_14: P1.8 Q9.2 R25.2 | length 138.9
  Top Layer w0.7: R25.2@58.309,108.331 58.436,108.458 Q9.2@62.992,108.458 ; v2(178.181,106.299) 178.181,104.14 180.121,102.2 P1.8@189.146,102.2
  Bottom Layer w0.7: Q9.2@62.992,108.458 61.849,107.315 61.849,106.299 62.992,105.156 149.479,105.156 150.749,106.426 v2@178.435,106.426
IO_15: P1.9 U2.1 U2.5 | length 48.4
  Top Layer w0.7: U2.1@158.986,116.655 161.856,116.655 162.687,115.824 162.687,102.636 U2.5@166.573,98.75
  Bottom Layer w1: U2.5@166.573,98.75 178.379,98.75 185.801,106.172 189.134,106.172 P1.9@189.146,106.16
IO_16: D7.C D10.A P1.10 U2.7 | length 74.7
  Top Layer w0.7: D7.C@138.176,108.429 138.176,108.129 138.226,108.079 138.526,108.079 143.062,103.543 143.062,103.047 143.112,102.997 144.907,102.997 v2(146.177,101.727)
  Bottom Layer w0.7: v2(146.177,101.727) 176.276,101.727 183.487,108.938 ; U2.7@166.477,108.938 183.487,108.938 ; P1.10@189.146,110.12 184.669,110.12 183.487,108.938
NetC1_2: C1.2 D12.A R16.2 R17.2 | length 13.8
  Top Layer w0.7: R16.2@64.119,75.819 64.119,76.234 66.786,78.901 66.786,79.359 R17.2@67.056,79.629 70.933,79.629 D12.A@71.441,80.137 71.441,82.173 72.485,83.216 72.735,83.216 72.834,83.316 C1.2@72.834,83.566
NetC2_1: C2.1 R7.1 U1.3 | length 20.7
  Top Layer w0.6: U1.3@77.916,98.933 79.883,98.933 80.391,99.441 80.391,107.569 82.931,110.109 C2.1@86.169,110.109
  Top Layer w0.7: R7.1@85.784,113.03 85.784,110.745 86.169,110.359 C2.1@86.169,110.109
NetC2_2: C2.2 Q6.1 R7.2 | length 11.7
  Top Layer w0.7: R7.2@88.519,113.712 88.789,113.442 R7.2@88.789,113.03 88.773,113.014 88.773,110.994 88.138,110.359 C2.2@88.138,110.109 88.138,109.955 88.238,109.855 v2(89.535,109.855) ; Q6.1@95.441,110.045 Q6.1@95.504,109.982
  Bottom Layer w0.7: v2(89.535,109.855) 89.599,109.918 95.441,109.918 Q6.1@95.504,109.982
NetC3_1: C3.1 D11.C Q7.1 R6.2 | length 16.2
  Top Layer w0.7: D11.C@75.594,75.819 76.835,75.819 78.486,77.47 80.772,77.47 81.026,77.724 R6.2@81.026,78.883 81.169,78.74 83.316,78.74 83.57,78.486 C3.1@83.82,78.486 84.07,78.486 86.356,80.772 Q7.1@88.773,80.772
NetC4_2: C4.2 R8.2 R14.2 | length 5.9
  Top Layer w0.7: C4.2@116.586,99.568 116.836,99.818 116.836,100.798 117.042,101.004 R14.2@117.042,102.489 117.012,102.518 117.012,105.254 R8.2@116.983,105.283
NetC5_2: C5.2 R11.1 R12.1 | length 5.9
  Top Layer w0.7: R11.1@97.128,75.438 97.128,77.628 96.647,78.109 C5.2@96.647,78.359 96.647,78.609 97.128,79.09 R12.1@97.128,80.899
NetC6_2: C6.2 Q10.1 R13.1 R15.2 | length 11.8
  Top Layer w0.7: C6.2@142.709,94.742 143.399,95.432 R15.2@143.399,97.282 ; R13.1@143.324,100.203 143.361,100.166 143.361,97.32 R15.2@143.399,97.282 ; Q10.1@149.098,97.663 143.519,97.663 143.399,97.543 R15.2@143.399,97.282
NetC7_1: C7.1 D14.C R18.1 R19.1 | length 23.8
  Top Layer w0.6: v2(42.037,113.919) 45.175,113.919 D14.C@45.302,114.046 ; v2(53.594,113.919) R19.1@55.177,113.919
  Top Layer w0.7: D14.C@45.302,114.046 45.302,112.056 46.31,111.048 46.367,111.048 46.712,110.703 R18.1@46.712,110.363 46.712,108.3 47.192,107.819 C7.1@47.192,107.569
  Bottom Layer w0.6: v2(42.037,113.919) v2(53.594,113.919)
NetC7_2: C7.2 R18.2 R20.2 | length 10.4
  Top Layer w0.7: C7.2@49.161,107.569 49.161,105.194 49.546,104.809 49.546,104.602 49.719,104.775 50.165,104.775 51.181,105.791 51.181,108.484 49.717,109.948 R18.2@49.717,110.363
NetC8_1: C8.1 D13.C R21.2 R24.2 | length 20.7
  Top Layer w0.7: D13.C@47.311,61.468 47.311,62.008 47.961,62.658 49.577,62.658 50.927,64.008 50.927,65.151 51.578,65.802 R21.2@51.578,67.945 v2(53.467,67.945) ; v2(60.015,68.001) 60.124,68.11 60.124,68.903 60.917,69.696 61.332,69.696 61.452,69.816 R24.2@61.452,70.231
  Bottom Layer w0.7: v2(53.467,67.945) 53.495,67.973 59.987,67.973 v2(60.015,68.001)